# EAGLE board CT_schematic (EAGLE 7.6.0)

Size 100 x 80 mm. Coordinates in mm from the lower left corner, seen from the top.
Outline: 0,0 100,0 100,80 0,80 0,0
Copper layers (1*16): Top 0.035mm / dielectric 1.5mm / Bottom 0.035mm
Design rules "default": minimum track width 10mil, minimum drill 24mil, track to track 8mil, track to pad 8mil, pad to pad 8mil, via to via 8mil, smd to smd 8mil, copper to edge 40mil, drill to drill 8mil, minimum pad ring 10mil, minimum via ring 8mil, stop-mask expansion 4mil, vias tented up to drill 0mil, thermal gap 10mil

## Footprints (pad centres in the part's own frame; a part is rotated, then mirrored left to right if it is on the bottom)
C0603 = smd 0.8 x 0.8: 1 -0.762,0; 2 0.762,0
C0402 = smd 0.5 x 0.5: 1 -0.508,0; 2 0.508,0
C0805 = smd 1.2 x 1.3: 1 -1.016,0; 2 1.016,0
C1210 = smd 1.2 x 2.5: 1 -1.524,0; 2 1.524,0
R0603 = smd 0.8 x 0.8: 1 -0.762,0; 2 0.762,0
EXV-9H = smd 3.505 x 1.676: 1 -2.857,0; 2 2.857,0
L0603 = smd 0.8 x 0.8: 1 -0.762,0; 2 0.762,0
IND25X25CZ = smd 2.489 x 3.429: 1 -2.718,0; 2 2.718,0
PJ-037B_PACKAGE = drill 3.7 square: 1 12,0 | drill 3.2 square: 2 6,0
LQFP100 = smd 0.3 x 1.2: 1 -6,-7.75; 2 -5.5,-7.75; 3 -5,-7.75; 4 -4.5,-7.75; 5 -4,-7.75; 6 -3.5,-7.75; 7 -3,-7.75; 8 -2.5,-7.75; 9 -2,-7.75; 10 -1.5,-7.75; 11 -1,-7.75; 12 -0.5,-7.75; 13 0,-7.75; 14 0.5,-7.75; 15 1,-7.75; 16 1.5,-7.75; 17 2,-7.75; 18 2.5,-7.75; 19 3,-7.75; 20 3.5,-7.75; 21 4,-7.75; 22 4.5,-7.75; 23 5,-7.75; 24 5.5,-7.75; 25 6,-7.75; 51 6,7.75; 52 5.5,7.75; 53 5,7.75; 54 4.5,7.75; 55 4,7.75; 56 3.5,7.75; 57 3,7.75; 58 2.5,7.75; 59 2,7.75; 60 1.5,7.75; 61 1,7.75; 62 0.5,7.75; 63 0,7.75; 64 -0.5,7.75; 65 -1,7.75; 66 -1.5,7.75; 67 -2,7.75; 68 -2.5,7.75; 69 -3,7.75; 70 -3.5,7.75; 71 -4,7.75; 72 -4.5,7.75; 73 -5,7.75; 74 -5.5,7.75; 75 -6,7.75 | smd 1.2 x 0.3: 26 7.75,-6; 27 7.75,-5.5; 28 7.75,-5; 29 7.75,-4.5; 30 7.75,-4; 31 7.75,-3.5; 32 7.75,-3; 33 7.75,-2.5; 34 7.75,-2; 35 7.75,-1.5; 36 7.75,-1; 37 7.75,-0.5; 38 7.75,0; 39 7.75,0.5; 40 7.75,1; 41 7.75,1.5; 42 7.75,2; 43 7.75,2.5; 44 7.75,3; 45 7.75,3.5; 46 7.75,4; 47 7.75,4.5; 48 7.75,5; 49 7.75,5.5; 50 7.75,6; 76 -7.75,6; 77 -7.75,5.5; 78 -7.75,5; 79 -7.75,4.5; 80 -7.75,4; 81 -7.75,3.5; 82 -7.75,3; 83 -7.75,2.5; 84 -7.75,2; 85 -7.75,1.5; 86 -7.75,1; 87 -7.75,0.5; 88 -7.75,0; 89 -7.75,-0.5; 90 -7.75,-1; 91 -7.75,-1.5; 92 -7.75,-2; 93 -7.75,-2.5; 94 -7.75,-3; 95 -7.75,-3.5; 96 -7.75,-4; 97 -7.75,-4.5; 98 -7.75,-5; 99 -7.75,-5.5; 100 -7.75,-6
DFN8-S = smd 0.6 x 0.4: 1 -2.69,1.905; 2 -2.69,0.635; 3 -2.69,-0.635; 4 -2.69,-1.905; 5 2.69,-1.905; 6 2.69,-0.635; 7 2.69,0.635; 8 2.69,1.905
MOLEX_47219-2001 = smd 0.8 x 1.5: 1 3.2,-2.1; 2 2.1,-2.1; 3 1,-2.1; 4 -0.1,-2.1; 5 -1.2,-2.1; 6 -2.3,-2.1; 7 -3.4,-2.1; 8 -4.5,-2.1 | smd 1.5 x 2.05: G1 6.875,-4.7; G2 6.875,3.6; G3 -6.875,3.6; G4 -6.875,-4.7
QFN-32 = smd 0.6 x 0.3: 1 -2.3,1.75; 2 -2.3,1.25; 3 -2.3,0.75; 4 -2.3,0.25; 5 -2.3,-0.25; 6 -2.3,-0.75; 7 -2.3,-1.25; 8 -2.3,-1.75; 17 2.3,-1.75; 18 2.3,-1.25; 19 2.3,-0.75; 20 2.3,-0.25; 21 2.3,0.25; 22 2.3,0.75; 23 2.3,1.25; 24 2.3,1.75 | smd 0.3 x 0.6: 9 -1.75,-2.3; 10 -1.25,-2.3; 11 -0.75,-2.3; 12 -0.25,-2.3; 13 0.25,-2.3; 14 0.75,-2.3; 15 1.25,-2.3; 16 1.75,-2.3; 25 1.75,2.3; 26 1.25,2.3; 27 0.75,2.3; 28 0.25,2.3; 29 -0.25,2.3; 30 -0.75,2.3; 31 -1.25,2.3; 32 -1.75,2.3 | smd 3.2 x 3.2: EXP 0,0
SJ-43515TS-SMT-TR = smd 2.2 x 3: 1 0.6,-7.4; 4 3.4,-7.4 | smd 3 x 3: 2 12.8,-7.4; 5 17,-3 | smd 2 x 3: 3 5.3,0; 6 2.5,0 | drill 1.8: P$7 4.5,-3.69; P$8 11.54,-3.69
WM-64PC = drill 0.6 pad 1: 1 -1,0.95; 2 -1,-0.95
TH58NVG3S0HBAI4 = smd 0.46 x 0.46: A1 -5.6,2.4; A2 -5.6,1.6; A9 -5.6,-5.6; A10 -5.6,-6.4; B1 -4.8,2.4; B9 -4.8,-5.6; B10 -4.8,-6.4; C3 -4,0.8; C4 -3.2,0.8; C5 -2.4,0.8; C6 -1.6,0.8; C7 -0.8,0.8; C8 0,0.8; D3 -4,0; D4 -3.2,0; D5 -2.4,0; D6 -1.6,0; D7 -0.8,0; D8 0,0; E3 -4,-0.8; E4 -3.2,-0.8; E5 -2.4,-0.8; E6 -1.6,-0.8; E7 -0.8,-0.8; E8 0,-0.8; F3 -4,-1.6; F4 -3.2,-1.6; F5 -2.4,-1.6; F6 -1.6,-1.6; F7 -0.8,-1.6; F8 0,-1.6; G3 -4,-2.4; G4 -3.2,-2.4; G5 -2.4,-2.4; G6 -1.6,-2.4; G7 -0.8,-2.4; G8 0,-2.4; H3 -4,-3.2; H4 -3.2,-3.2; H5 -2.4,-3.2; H6 -1.6,-3.2; H7 -0.8,-3.2; H8 0,-3.2; J3 -4,-4; J4 -3.2,-4; J5 -2.4,-4; J6 -1.6,-4; J7 -0.8,-4; J8 0,-4; K3 -4,-4.8; K4 -3.2,-4.8; K5 -2.4,-4.8; K6 -1.6,-4.8; K7 -0.8,-4.8; K8 0,-4.8; L1 0.8,2.4; L2 0.8,1.6; L9 0.8,-5.6; L10 0.8,-6.4; M1 1.6,2.4; M2 1.6,1.6; M9 1.6,-5.6; M10 1.6,-6.4
ABS07-32.768KHZ-7-T = smd 1.1 x 2.4: 1 -2.5,0; 2 0,0
ABLS-25.000MHZ-B2F-T = smd 5.6 x 2.8: 1 -3.81,0; 2 5.69,0
ASFL1 = smd 1.7 x 1.5: 1 -1.27,-1.1; 2 1.27,-1.1; 3 1.27,1.1; 4 -1.27,1.1
IR3899MTR1PBF = smd 0.25 x 0.75: 1 0,0; 2 0.5,0; 3 1,0; 4 1.5,0; 5 2,0; 6 2.5,0; 7 3,0 | smd 0.75 x 0.25: 8 3.425,0.78; 9 3.425,1.28; 10 3.425,1.78; 14 -0.425,1.78; 15 -0.425,1.28; 16 -0.425,0.78 | smd 0.3 x 1.95: 11 3.22,3.63 | smd 1.62 x 2.42: 12 1.786,3.8 | smd 1 x 1.95: 13 0.117,3.63 | smd 2.19 x 1.25: 17 1.51,1.26
SON-6 = smd 0.55 x 0.3: 1 -0.355,0.5 | smd 0.52 x 0.3: 2 -0.37,0; 3 -0.37,-0.5; 4 0.37,-0.5; 5 0.37,0; 6 0.37,0.5
SW_4-1437565-2 = smd 1.4 x 2.1: 1 -2.23,4.55; 2 -2.23,-4.55; 3 2.23,4.55; 4 2.23,-4.55
LGM67K-G1J2-24-Z = smd 0.8 x 1.4: A -2,0; C 0,0
NC7SZ125M5X = smd 1.3 x 0.7: 1 -1.3,0.95; 2 -1.3,0; 3 -1.3,-0.95; 4 1.3,-0.95; 5 1.3,0.95

## Placement (x,y rotation side)
C1  1e-06  [C0603]  -76.2,86.36 0 top  (outside the outline)
C2  1e-07  [C0603]  -80.01,86.36 0 top  (outside the outline)
C3  1e-07  [C0603]  -83.82,86.36 0 top  (outside the outline)
C4  1e-07  [C0603]  -87.63,86.36 0 top  (outside the outline)
C5  1e-07  [C0603]  -91.44,86.36 0 top  (outside the outline)
C6  1e-07  [C0603]  -15.24,91.44 0 top  (outside the outline)
C7  1e-07  [C0603]  -19.05,91.44 0 top  (outside the outline)
C8  4.7e-06  [C0603]  -64.77,86.36 0 top  (outside the outline)
C9  1e-08  [C0603]  -22.86,91.44 0 top  (outside the outline)
C10  1e-06  [C0603]  -26.67,91.44 0 top  (outside the outline)
C11  1e-11  [C0402]  -34.29,96.52 0 top  (outside the outline)
C12  1e-11  [C0402]  -38.1,96.52 0 top  (outside the outline)
C13  1e-11  [C0402]  -41.91,96.52 0 top  (outside the outline)
C14  1e-11  [C0402]  -45.72,96.52 0 top  (outside the outline)
C15  1e-08  [C0402]  -49.53,96.52 0 top  (outside the outline)
C16  1e-08  [C0402]  -53.34,96.52 0 top  (outside the outline)
C17  1e-07  [C0402]  -57.15,96.52 0 top  (outside the outline)
C18  1e-05  [C0805]  -66.04,68.58 0 top  (outside the outline)
C19  1e-06  [C0603]  -30.48,91.44 0 top  (outside the outline)
C20  1e-06  [C0603]  -34.29,91.44 0 top  (outside the outline)
C21  1e-06  [C0603]  -38.1,91.44 0 top  (outside the outline)
C22  1e-06  [C0603]  -41.91,91.44 0 top  (outside the outline)
C23  1e-06  [C0603]  -45.72,91.44 0 top  (outside the outline)
C24  1e-06  [C0603]  -49.53,91.44 0 top  (outside the outline)
C25  1e-06  [C0603]  -53.34,91.44 0 top  (outside the outline)
C26  1e-07  [C0402]  -60.96,96.52 0 top  (outside the outline)
C27  1e-07  [C0402]  -64.77,96.52 0 top  (outside the outline)
C28  1e-07  [C0402]  -68.58,96.52 0 top  (outside the outline)
C29  1e-07  [C0402]  -72.39,96.52 0 top  (outside the outline)
C30  1e-06  [C0603]  -57.15,91.44 0 top  (outside the outline)
C31  1e-05  [C0805]  -71.12,68.58 0 top  (outside the outline)
C32  1e-07  [C0402]  -76.2,96.52 0 top  (outside the outline)
C33  1e-07  [C0402]  -80.01,96.52 0 top  (outside the outline)
C34  1e-08  [C0402]  -83.82,96.52 0 top  (outside the outline)
C35  0.0001  [C1210]  -48.26,68.58 0 top  (outside the outline)
C36  2.2e-06  [C0603]  -68.58,86.36 0 top  (outside the outline)
C37  1e-07  [C0402]  -87.63,96.52 0 top  (outside the outline)
C38  1e-07  [C0402]  -91.44,96.52 0 top  (outside the outline)
C39  8.6971073877236e-09  [R0603]  -81.28,67.31 0 top  (outside the outline)
C40  2.9649229730876e-07  [R0603]  -91.44,67.31 0 top  (outside the outline)
C43  0.0001  [C1210]  -54.61,68.58 0 top  (outside the outline)
C44  2.2e-06  [C0603]  -72.39,86.36 0 top  (outside the outline)
C45  1e-07  [C0402]  -15.24,101.6 0 top  (outside the outline)
C46  1e-07  [C0402]  -19.05,101.6 0 top  (outside the outline)
C47  8.6971073877236e-09  [R0603]  -20.32,76.2 0 top  (outside the outline)
C48  2.9649229730876e-07  [R0603]  -30.48,76.2 0 top  (outside the outline)
C51  1e-07  [C0402]  -22.86,101.6 0 top  (outside the outline)
C52  0.0001  [EXV-9H]  -36.83,59.69 0 top  (outside the outline)
C53  0.0001  [EXV-9H]  -48.26,59.69 0 top  (outside the outline)
C54  1e-08  [C0402]  -26.67,101.6 0 top  (outside the outline)
F1  240.0  [L0603]  -60.96,91.44 0 top  (outside the outline)
I1  6.8e-07  [IND25X25CZ]  -78.74,59.69 0 top  (outside the outline)
I2  6.8e-07  [IND25X25CZ]  -87.63,59.69 0 top  (outside the outline)
J1  PJ-037B  [PJ-037B_PACKAGE]  -55.88,38.1 0 top  (outside the outline)
R2  1000.0  [R0603]  -64.77,91.44 0 top  (outside the outline)
R4  4700.0  [R0603]  -68.58,91.44 0 top  (outside the outline)
R5  2200.0  [R0603]  -72.39,91.44 0 top  (outside the outline)
R6  2200.0  [R0603]  -76.2,91.44 0 top  (outside the outline)
R7  2200.0  [R0603]  -80.01,91.44 0 top  (outside the outline)
R8  2200.0  [R0603]  -83.82,91.44 0 top  (outside the outline)
R9  10000.0  [R0603]  -55.88,81.28 0 top  (outside the outline)
R10  10000.0  [R0603]  -60.96,81.28 0 top  (outside the outline)
R11  10000.0  [R0603]  -66.04,81.28 0 top  (outside the outline)
R12  10000.0  [R0603]  -71.12,81.28 0 top  (outside the outline)
R13  10000.0  [R0603]  -76.2,81.28 0 top  (outside the outline)
R14  10000.0  [R0603]  -81.28,81.28 0 top  (outside the outline)
R15  10000.0  [R0603]  -86.36,81.28 0 top  (outside the outline)
R16  100000.0  [R0603]  -15.24,81.28 0 top  (outside the outline)
R17  100000.0  [R0603]  -20.32,81.28 0 top  (outside the outline)
R18  100000.0  [R0603]  -25.4,81.28 0 top  (outside the outline)
R19  100000.0  [R0603]  -30.48,81.28 0 top  (outside the outline)
R20  100000.0  [R0603]  -35.56,81.28 0 top  (outside the outline)
R21  100000.0  [R0603]  -40.64,81.28 0 top  (outside the outline)
R22  1270.0  [R0603]  -87.63,91.44 0 top  (outside the outline)
R23  1270.0  [R0603]  -91.44,91.44 0 top  (outside the outline)
R24  10000.0  [R0603]  -91.44,81.28 0 top  (outside the outline)
R25  10000.0  [R0603]  -15.24,86.36 0 top  (outside the outline)
R26  10000.0  [R0603]  -20.32,86.36 0 top  (outside the outline)
R27  10000.0  [R0603]  -25.4,86.36 0 top  (outside the outline)
R28  10000.0  [R0603]  -30.48,86.36 0 top  (outside the outline)
R29  0.1  [R0603]  -15.24,96.52 0 top  (outside the outline)
R30  4030.2416170974  [R0603]  -38.1,76.2 0 top  (outside the outline)
R31  2878.7440122125  [R0603]  -45.72,76.2 0 top  (outside the outline)
R32  58.613333333333  [R0603]  -53.34,76.2 0 top  (outside the outline)
R33  130.0  [R0603]  -19.05,96.52 0 top  (outside the outline)
R34  39000.0  [R0603]  -35.56,86.36 0 top  (outside the outline)
R35  49900.0  [R0603]  -40.64,86.36 0 top  (outside the outline)
R36  5147.5789473684  [R0603]  -60.96,76.2 0 top  (outside the outline)
R37  0.1  [R0603]  -22.86,96.52 0 top  (outside the outline)
R38  4030.2416170974  [R0603]  -68.58,76.2 0 top  (outside the outline)
R39  719.68600305311  [R0603]  -76.2,76.2 0 top  (outside the outline)
R40  58.613333333333  [R0603]  -83.82,76.2 0 top  (outside the outline)
R41  130.0  [R0603]  -26.67,96.52 0 top  (outside the outline)
R42  39000.0  [R0603]  -45.72,86.36 0 top  (outside the outline)
R43  49900.0  [R0603]  -50.8,86.36 0 top  (outside the outline)
R44  5147.5789473684  [R0603]  -91.44,76.2 0 top  (outside the outline)
R45  10000.0  [R0603]  -55.88,86.36 0 top  (outside the outline)
R46  10000.0  [R0603]  -60.96,86.36 0 top  (outside the outline)
R47  9100.0  [R0603]  -30.48,96.52 0 top  (outside the outline)
R48  680000.0  [R0603]  -45.72,81.28 0 top  (outside the outline)
R49  120000.0  [R0603]  -50.8,81.28 0 top  (outside the outline)
U1  stm32f103vct6  [LQFP100]  -22.86,8.89 0 top  (outside the outline)
U2  24AA256-I/MF  [DFN8-S]  -46.99,50.8 0 top  (outside the outline)
U3  24AA512-I/MF  [DFN8-S]  -59.69,50.8 0 top  (outside the outline)
U4  0472192001  [MOLEX_47219-2001]  -41.91,8.89 0 top  (outside the outline)
U5  SGTL5000XNAA3  [QFN-32]  -73.66,50.8 0 top  (outside the outline)
U6  SJ-43515TS-SMT-TR  [SJ-43515TS-SMT-TR]  -39.37,26.67 0 top  (outside the outline)
U7  SJ-43515TS-SMT-TR  [SJ-43515TS-SMT-TR]  -67.31,26.67 0 top  (outside the outline)
U8  SJ-43515TS-SMT-TR  [SJ-43515TS-SMT-TR]  -39.37,40.64 0 top  (outside the outline)
U9  WM-64PCT  [WM-64PC]  -34.29,50.8 0 top  (outside the outline)
U10  TH58NVG3S0HBAI4  [TH58NVG3S0HBAI4]  -63.5,10.16 0 top  (outside the outline)
U11  ABS07-32.768KHZ-7-T  [ABS07-32.768KHZ-7-T]  -27.94,69.85 0 top  (outside the outline)
U12  ABLS-25.000MHZ-B2F-T  [ABLS-25.000MHZ-B2F-T]  -67.31,60.96 0 top  (outside the outline)
U13  ASFL-24.57MHZ-NCS  [ASFL1]  -27.94,60.96 0 top  (outside the outline)
U14  IR3899MTR1PBF  [IR3899MTR1PBF]  -88.9,34.29 0 top  (outside the outline)
U15  IR3899MTR1PBF  [IR3899MTR1PBF]  -25.4,48.26 0 top  (outside the outline)
U16  TPS3895ADRYR  [SON-6]  -29.21,100.33 0 top  (outside the outline)
U17  4-1437565-2  [SW_4-1437565-2]  -72.39,38.1 0 top  (outside the outline)
U18  Q65110A2395  [LGM67K-G1J2-24-Z]  -36.83,68.58 0 top  (outside the outline)
U19  nc7sz125m5x  [NC7SZ125M5X]  -59.69,67.31 0 top  (outside the outline)

## Library data of the parts
C1-C40 C43-C48 C51-C54 F1 I1 I2 J1 R2 R4-R49 U1-U19 = circuit_tree

## Nets
CLK_CRYSTAL_U1_8: C11.1 U1.8 U11.1
CLK_CRYSTAL_U1_9: C12.1 U1.9 U11.2
CLK_CRYSTAL_U1_12: C13.1 U1.12 U12.1
CLK_CRYSTAL_U1_13: C14.1 U1.13 U12.2
CLK_U5_21: U5.21 U13.3
GND: C1.2 C2.2 C3.2 C4.2 C5.2 C6.2 C7.2 C8.2 C9.2 C10.2 C11.2 C12.2 C13.2 C14.2 C15.2 C16.2 C17.2 C18.2 C26.2 C27.2 C28.2 C29.2 C30.2 C31.2 C32.2 C33.2 C34.2 C36.2 C37.2 C38.2 C44.2 C45.2 C46.2 C51.2 C52.2 C53.2 C54.2 J1.2 R2.2 R9.2 R10.2 R11.2 R14.2 R15.2 R23.2 R29.1 R29.2 R31.2 R34.2 R36.2 R37.1 R37.2 R39.2 R42.2 R44.2 R47.2 R49.2 U1.10 U1.19 U1.20 U1.27 U1.49 U1.74 U1.99 U2.4 U2.7 U3.4 U4.6 U4.G1 U4.G2 U4.G3 U4.G4 U5.1 U5.3 U5.7 U5.EXP U7.1 U8.1 U9.2 U10.C5 U10.K3 U10.K8 U13.2 U14.4 U14.11 U14.17 U15.4 U15.11 U15.17 U16.2 U18.C U19.1 U19.3
NET_U1_14: R4.1 U1.14 U19.4
NET_U1_22: C9.1 C10.1 F1.1 U1.21 U1.22
NET_U1_47: R7.1 U1.47 U3.6
NET_U1_48: R8.1 U1.48 U3.5
NET_U1_92: R5.1 U1.92 U2.6
NET_U1_93: R6.1 U1.93 U2.5
NET_U1_94: R9.1 U1.94
NET_U1_97: U18.A
NET_U1_98: U17.3 U17.4
NET_U2_1: R10.1 U2.1
NET_U2_2: R11.1 U2.2
NET_U2_3: R12.1 U2.3
NET_U3_1: R13.1 U3.1
NET_U3_2: R14.1 U3.2
NET_U3_3: R15.1 U3.3
NET_U5_10: C29.1 U5.10
NET_U5_29: R22.1 U5.29
NET_U5_31: R23.1 U5.31
NET_U6_1: U5.4 U6.1
NET_U6_2: U5.2 U6.2
NET_U6_5: U5.6 U6.5
NET_U7_2: C20.1 U7.2
NET_U7_5: C19.1 U7.5
NET_U7_11: C20.2
NET_U7_12: C19.2
NET_U8_2: C22.1 C23.1 U8.2
NET_U8_5: C21.1 U8.5
NET_U8_13: C22.2 C23.2
NET_U8_14: C21.2
NET_U9_1: C24.1 C25.1 C30.1 U5.16 U9.1
NET_U9_15: C24.2 C25.2
NET_U10_C3: R27.1 U10.C3
NET_U10_C8: R28.1 U10.C8
NET_U14_1: C39.1 R30.1 R31.1 R32.1 R33.1 U14.1 U14.8
NET_U14_2: C38.1 U14.2
NET_U14_3: C39.2 C40.1 C40.2 U14.3
NET_U14_5: R34.1 U14.5
NET_U14_10: C36.1 U14.10
NET_U14_12: C35.1 I1.1 U14.12
NET_U14_13: U14.13
NET_U14_14: C35.2 U14.14
NET_U14_15: R35.1 R36.1 U14.15
NET_U14_ATNET_3: I1.2 R30.2
NET_U14_ATNET_4: C40.2 R32.2
NET_U14_ATNET_5: R33.2
NET_U15_1: C47.1 R38.1 R39.1 R40.1 R41.1 U15.1 U15.8
NET_U15_2: C46.1 U15.2
NET_U15_3: C47.2 C48.1 C48.2 U15.3
NET_U15_5: R42.1 U15.5
NET_U15_10: C44.1 U15.10
NET_U15_12: C43.1 I2.1 U15.12
NET_U15_13: U15.13
NET_U15_14: C43.2 U15.14
NET_U15_15: R43.1 R44.1 U15.15
NET_U15_ATNET_3: I2.2 R38.2
NET_U15_ATNET_4: C48.2 R40.2
NET_U15_ATNET_5: R41.2
NET_U16_1: R46.1 R47.1 U16.1
NET_U16_3: R48.2 R49.1 U16.3
NET_U16_4: R45.1 U16.4 U19.2
NET_U17_1: R2.1 U17.1 U17.2
PROC_FSMC_D0: U1.61 U10.H4
PROC_FSMC_D1: U1.62 U10.J4
PROC_FSMC_D2: U1.81 U10.K4
PROC_FSMC_D3: U1.82 U10.K5
PROC_FSMC_D4: U1.38 U10.K6
PROC_FSMC_D5: U1.39 U10.J7
PROC_FSMC_D6: U1.40 U10.K7
PROC_FSMC_D7: U1.41 U10.J8
PROC_FSMC_NCE2: R24.1 U1.88 U10.C6
PROC_FSMC_NOE: R25.1 U1.85 U10.D4
PROC_FSMC_NWE: R26.1 U1.86 U10.C7
PROC_I2S2_CK: U1.52 U5.24
PROC_I2S2_SD: U1.54 U5.26
PROC_I2S2_WS: U1.51 U5.23
PROC_SDIO_CK: R17.1 U1.80 U4.5
PROC_SDIO_CMD: R16.1 U1.83 U4.3
PROC_SDIO_D0: R18.1 U1.65 U4.7
PROC_SDIO_D1: R19.1 U1.66 U4.8
PROC_SDIO_D2: R20.1 U1.78 U4.1
PROC_SDIO_D3: R21.1 U1.79 U4.2
VCC_S1_16V8: C37.1 C45.1 C52.1 C53.1 J1.1 R35.2 R43.2 U14.9 U15.9
VCC_TIER1_1V2: C26.1 I1.2 R30.2 U5.30
VCC_TIER1_3V3: C1.1 C2.1 C3.1 C4.1 C5.1 C6.1 C7.1 C8.1 C15.1 C16.1 C17.1 C18.1 C27.1 C28.1 C31.1 C32.1 C33.1 C34.1 C51.1 C54.1 F1.2 I2.2 R4.2 R5.2 R6.2 R7.2 R8.2 R12.2 R13.2 R16.2 R17.2 R18.2 R19.2 R20.2 R21.2 R22.2 R24.2 R25.2 R26.2 R27.2 R28.2 R38.2 R45.2 R46.2 R48.1 U1.6 U1.11 U1.28 U1.50 U1.75 U1.100 U2.8 U3.7 U3.8 U4.4 U5.5 U5.20 U10.H8 U10.J6 U13.4 U16.6 U19.5

## Tracks (layer width: path | path; a pad name or v marks a point on that pad's centre or on a via)
CLK_CRYSTAL_U1_8  (2 unrouted)
CLK_CRYSTAL_U1_9  (2 unrouted)
CLK_CRYSTAL_U1_12  (2 unrouted)
CLK_CRYSTAL_U1_13  (2 unrouted)
CLK_U5_21  (1 unrouted)
GND  (92 unrouted)
NET_U1_14  (2 unrouted)
NET_U1_22  (4 unrouted)
NET_U1_47  (2 unrouted)
NET_U1_48  (2 unrouted)
NET_U1_92  (2 unrouted)
NET_U1_93  (2 unrouted)
NET_U1_94  (1 unrouted)
NET_U1_98  (1 unrouted)
NET_U2_1  (1 unrouted)
NET_U2_2  (1 unrouted)
NET_U2_3  (1 unrouted)
NET_U3_1  (1 unrouted)
NET_U3_2  (1 unrouted)
NET_U3_3  (1 unrouted)
NET_U5_10  (1 unrouted)
NET_U5_29  (1 unrouted)
NET_U5_31  (1 unrouted)
NET_U6_1  (1 unrouted)
NET_U6_2  (1 unrouted)
NET_U6_5  (1 unrouted)
NET_U7_2  (1 unrouted)
NET_U7_5  (1 unrouted)
NET_U8_2  (2 unrouted)
NET_U8_5  (1 unrouted)
NET_U8_13  (1 unrouted)
NET_U9_1  (4 unrouted)
NET_U9_15  (1 unrouted)
NET_U10_C3  (1 unrouted)
NET_U10_C8  (1 unrouted)
NET_U14_1  (6 unrouted)
NET_U14_2  (1 unrouted)
NET_U14_3  (3 unrouted)
NET_U14_5  (1 unrouted)
NET_U14_10  (1 unrouted)
NET_U14_12  (2 unrouted)
NET_U14_14  (1 unrouted)
NET_U14_15  (2 unrouted)
NET_U14_ATNET_3  (1 unrouted)
NET_U14_ATNET_4  (1 unrouted)
NET_U15_1  (6 unrouted)
NET_U15_2  (1 unrouted)
NET_U15_3  (3 unrouted)
NET_U15_5  (1 unrouted)
NET_U15_10  (1 unrouted)
NET_U15_12  (2 unrouted)
NET_U15_14  (1 unrouted)
NET_U15_15  (2 unrouted)
NET_U15_ATNET_3  (1 unrouted)
NET_U15_ATNET_4  (1 unrouted)
NET_U16_1  (2 unrouted)
NET_U16_3  (2 unrouted)
NET_U16_4  (2 unrouted)
NET_U17_1  (2 unrouted)
PROC_FSMC_D0  (1 unrouted)
PROC_FSMC_D1  (1 unrouted)
PROC_FSMC_D2  (1 unrouted)
PROC_FSMC_D3  (1 unrouted)
PROC_FSMC_D4  (1 unrouted)
PROC_FSMC_D5  (1 unrouted)
PROC_FSMC_D6  (1 unrouted)
PROC_FSMC_D7  (1 unrouted)
PROC_FSMC_NCE2  (2 unrouted)
PROC_FSMC_NOE  (2 unrouted)
PROC_FSMC_NWE  (2 unrouted)
PROC_I2S2_CK  (1 unrouted)
PROC_I2S2_SD  (1 unrouted)
PROC_I2S2_WS  (1 unrouted)
PROC_SDIO_CK  (2 unrouted)
PROC_SDIO_CMD  (2 unrouted)
PROC_SDIO_D0  (2 unrouted)
PROC_SDIO_D1  (2 unrouted)
PROC_SDIO_D2  (2 unrouted)
PROC_SDIO_D3  (2 unrouted)
VCC_S1_16V8  (8 unrouted)
VCC_TIER1_1V2  (3 unrouted)
VCC_TIER1_3V3  (61 unrouted)